# Altium PCB SmartstickQuaternions.PcbDoc
Units mm, origin at the board's own origin, x right, y up, seen from the top; angles counter-clockwise.
Board outline 55 x 49.5 mm, 2 copper layers (Top Layer, Bottom Layer); 20 components, 14 nets, 118 pads, 0 vias.
Unrouted connection lines stored in the file: 1.
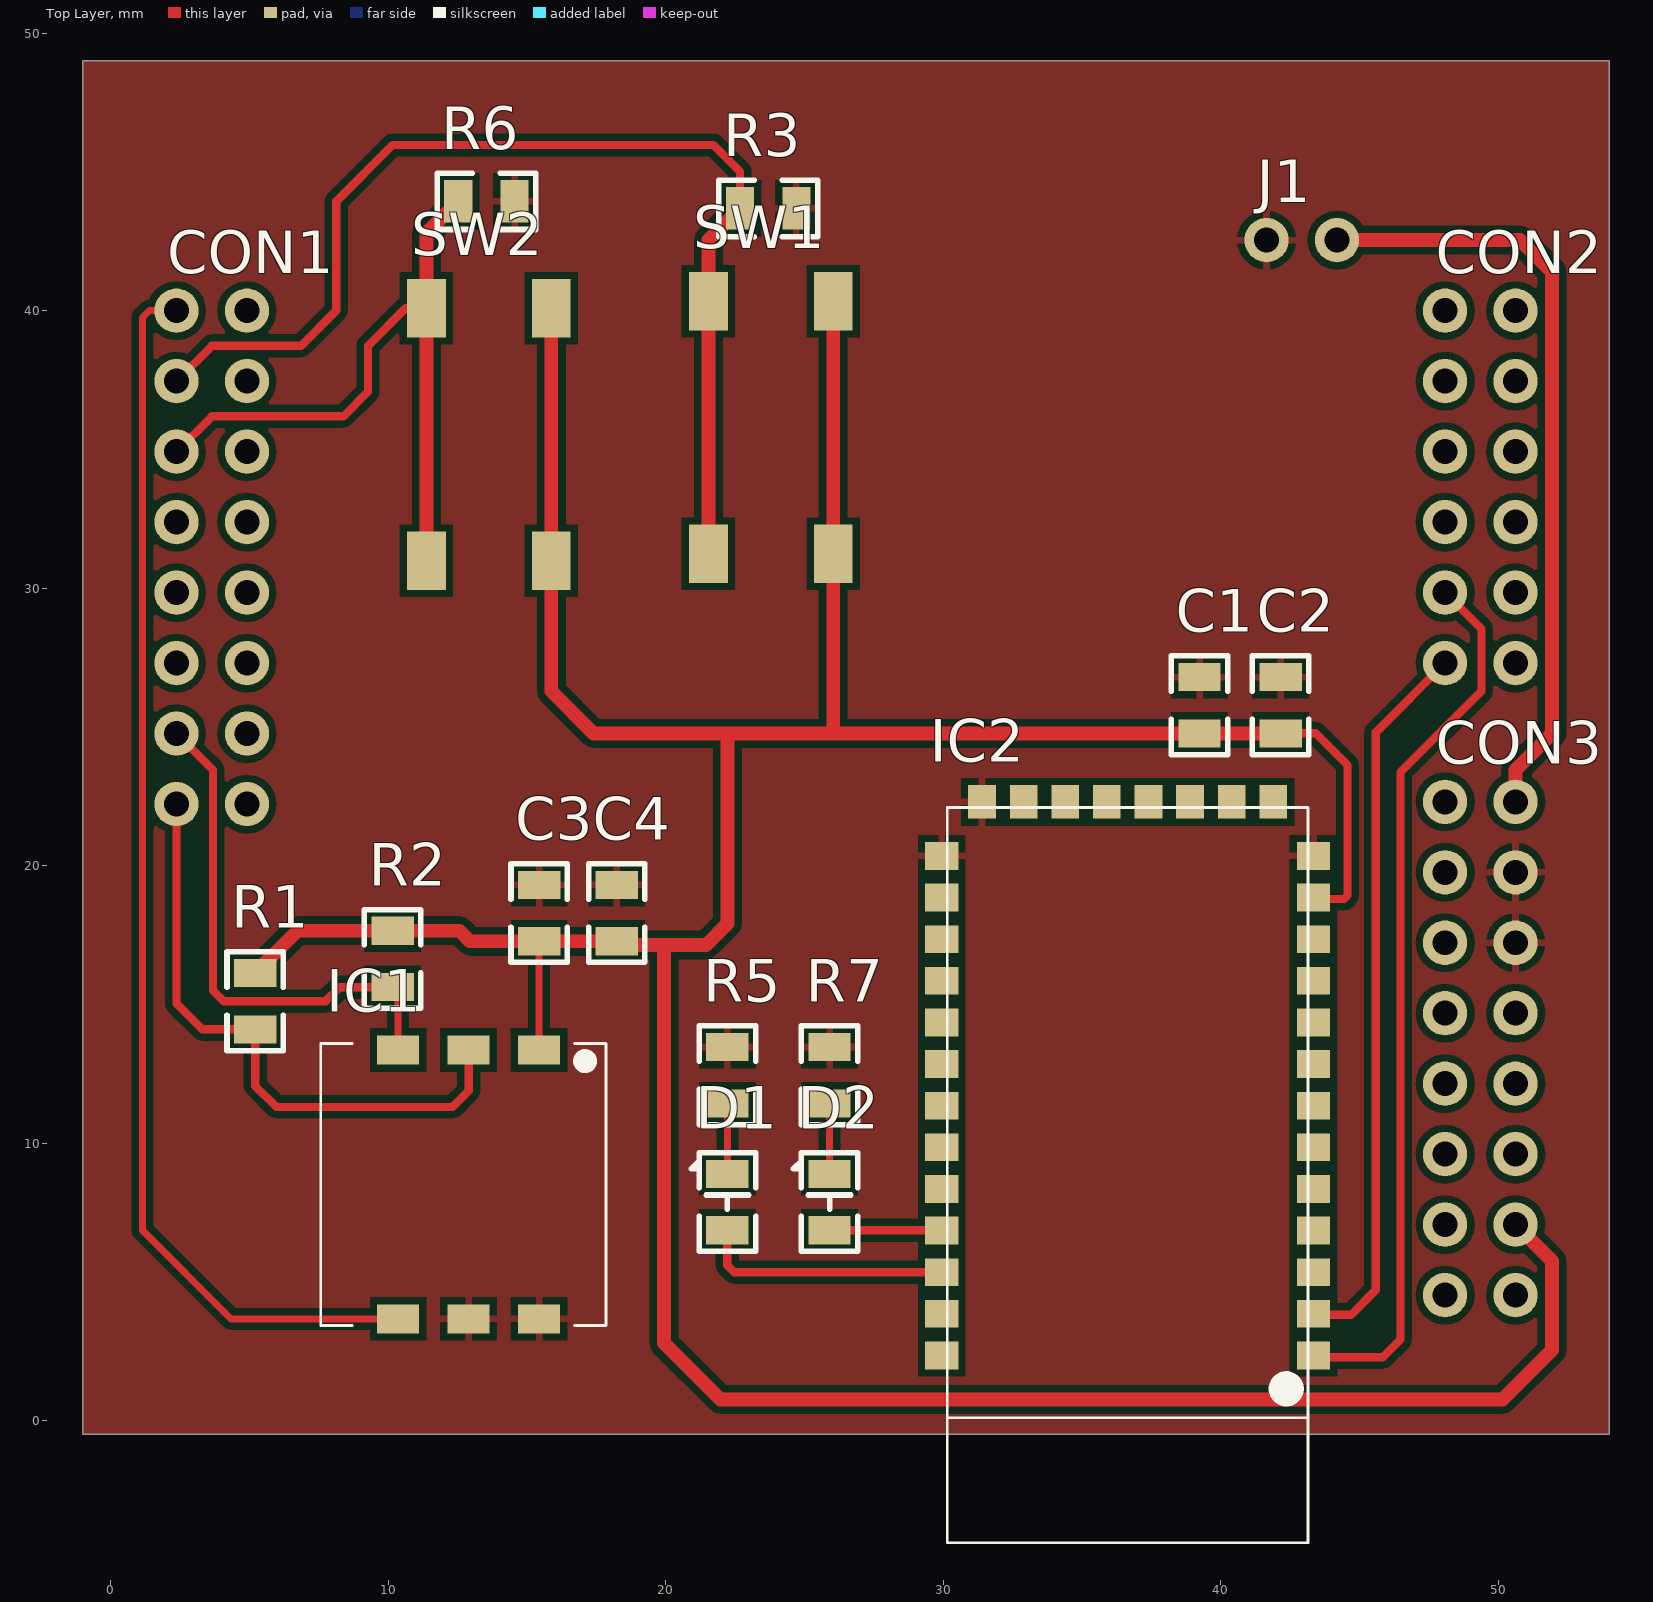
[diagram p0: Top Layer view]
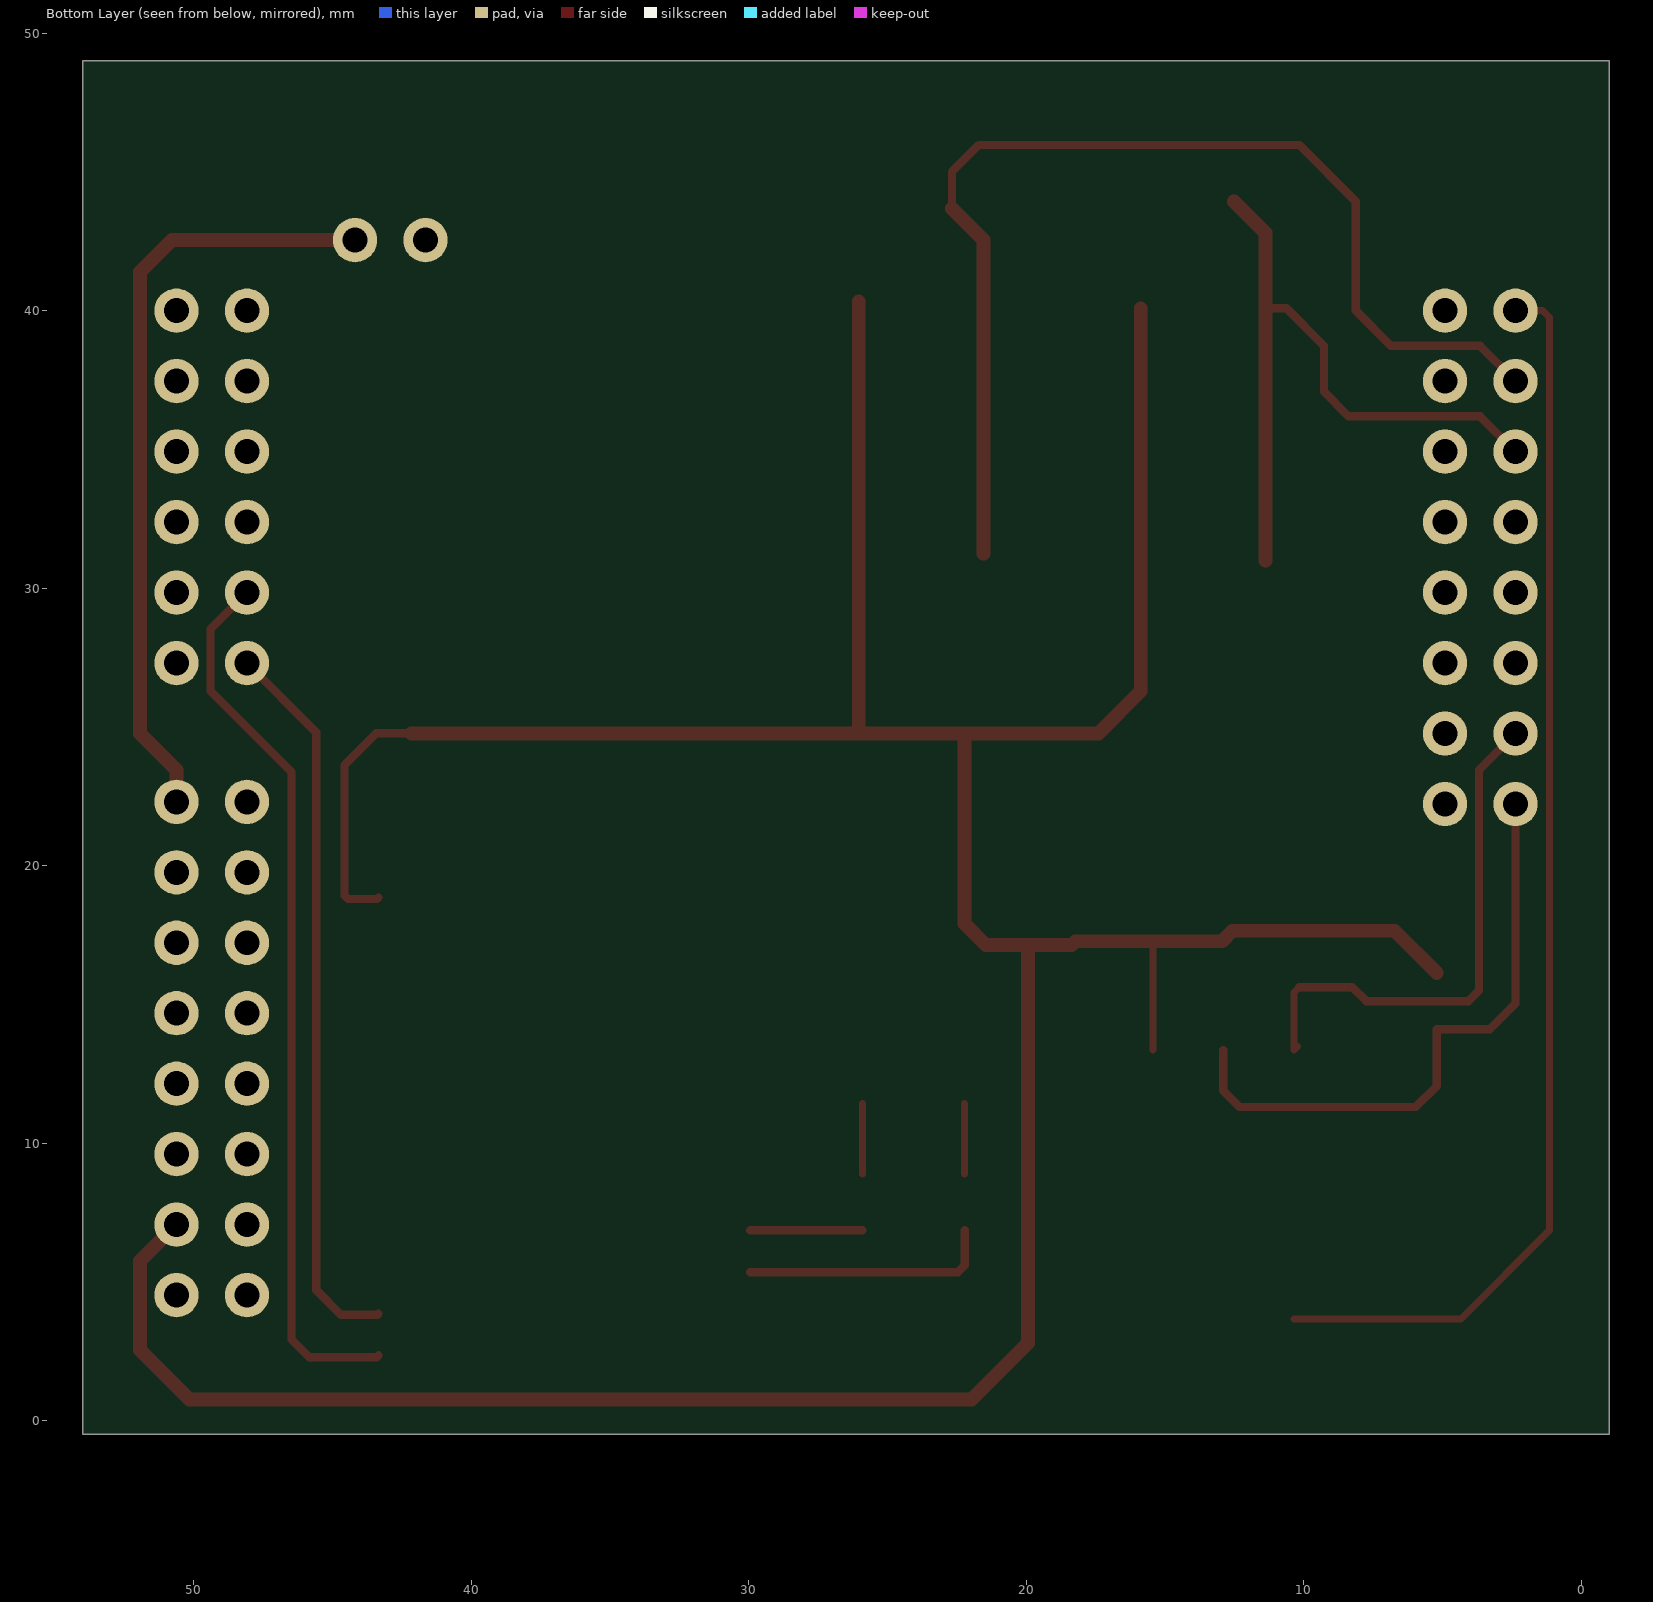
[diagram p1: Bottom Layer view, seen from below]

## Layer stack, top to bottom
Top Solder: solder mask 0.0102, Solder Resist, Dk 3.5
Top Layer: signal copper 0.0356
Dielectric 1: dielectric 0.32, FR-4, Dk 4.8
Bottom Layer: signal copper 0.0356
Bottom Solder: solder mask 0.0102, Solder Resist, Dk 3.5

## Board outline
-1,-0.5 -1,49 54,49 54,-0.5

## Design rules (kind name [scope] priority, off if disabled: settings)
Clearance [All] p1: gap=0.254
PolygonConnect [All] p1: connectstyle=Relief reliefconductorwidth=0.254 reliefentries=4 polygonreliefangle="90 Angle" airgapwidth=0.254
RoutingVias [All] p1: holewidth=0.711 width=1.27 viastyle="Through Hole" minholewidth=0.711 minwidth=1.27 maxholewidth=0.711 maxwidth=1.27
SolderMaskExpansion [All] p1: expansion=0.102
Width [All] p1: maxlimit=1.5 minlimit=0.254 preferedwidth=0.254 minimp=50.000000 maximp=50.000000 favimp=50.000000
29 further rules are at their usual default settings.

## Components (designator, comment, footprint, x,y, rotation, side; value= is the part's Value field where it differs from the comment)
C1 "1uF" 080503 39.243,25.781 r90 top
C2 "100nF" 080503 42.164,25.781 r90 top
C3 "1uF" 080503 15.443,18.288 r90 top
C4 "100nF" 080503 18.237,18.288 r90 top
CON1 "CON_8_2" J208 2.37,40 r270 top locked
CON2 "CON_6_2" J206 48.09,40 r270 top locked
CON3 "CON_8_2" J208 48.09,22.3 r270 top locked
D1 "LED" 0805_Led 22.225,7.874 r90 top
D2 "LED" 0805_Led 25.908,7.874 r90 top
IC1 "EM7180SFP" Footprint_EM7180 7.569,8.509 r270 top
IC2 "Bluetooth" "BT HC-05" 36.652,22.098 r180 top
J1 "CON2" J201 44.196,42.545 r180 top
R1 "RES" 080501 5.207,15.113 r270 top
R2 "RES" 080501 10.16,16.637 r270 top
R3 "RES" 080501 23.698,43.688 r0 top
R5 "RES" 080501 22.225,12.446 r90 top
R6 "RES" 080501 13.538,43.942 r0 top
R7 "RES" 080501 25.908,12.446 r90 top
SW1 "SW PUSHBUTTON" BOUTONPOUSSOIR 21.539,31.242 r0 top
SW2 "SW PUSHBUTTON" BOUTONPOUSSOIR 11.379,30.988 r0 top

## Footprints (in the part's own frame and the unit in brackets; to place one, negate y for a bottom-side part, rotate by r counter-clockwise, add the part's x,y. Pads: shape width x height; smd on the part's side, far side on the other; paste and mask are expansions set on the pad)
0805_Led [mil] "0805 pour LED SMD"
  rect 40x60 smd: 1(-40,0) 2(40,0)
  silkscreen extent -70,-40 70,51
080501 [mil]
  rect 40x60 smd: 1(-40,0) 2(40,0)
  silkscreen extent -70,-40 70,40
080503 [mil]
  rect 40x60 smd: 1(-40,0) 2(40,0)
  silkscreen extent -70,-40 70,40
BOUTONPOUSSOIR [mm]
  rect 1.4x2.1 smd: 1(0,0) 1(0,9.1) 2(4.5,0) 2(4.5,9.1)
"BT HC-05" [mm]
  rect 1.2x1 smd: 1(-6.7,19.75) 2(-6.7,18.25) 3(-6.7,16.75) 4(-6.7,15.25) 5(-6.7,13.75) 6(-6.7,12.25) 7(-6.7,10.75) 8(-6.7,9.25) 9(-6.7,7.75) 10(-6.7,6.25) 11(-6.7,4.75) 12(-6.7,3.25) 13(-6.7,1.75) 22(6.7,1.75) 23(6.7,3.25) 24(6.7,4.75) 25(6.7,6.25) 26(6.7,7.75) 27(6.7,9.25) 28(6.7,10.75) 29(6.7,12.25) 30(6.7,13.75) 31(6.7,15.25) 32(6.7,16.75) 33(6.7,18.25) 34(6.7,19.75)
  rect 1x1.2 smd: 14(-5.25,-0.2) 15(-3.75,-0.2) 16(-2.25,-0.2) 17(-0.75,-0.2) 18(0.75,-0.2) 19(2.25,-0.2) 20(3.75,-0.2) 21(5.25,-0.2)
  silkscreen extent -6.5,0 6.5,26.5
Footprint_EM7180 [mm]
  rect 1.05x1.52 smd: 1(-4.845,7.87) 2(-4.845,5.33) 3(-4.845,2.79) 4(4.845,2.79) 5(4.845,5.33) 6(4.845,7.87)
  silkscreen extent -5.08,0 5.08,10.28
J201 [mm]
  round 1.6 hole 0.9: 1(0,0) 2(2.54,0)
J206 [mm]
  round 1.6 hole 0.9: 1(0,0) 2(2.54,0) 3(5.08,0) 4(7.62,0) 5(10.16,0) 6(12.7,0) 7(12.7,2.54) 8(10.16,2.54) 9(7.62,2.54) 10(5.08,2.54) 11(2.54,2.54) 12(0,2.54)
J208 [mm]
  round 1.6 hole 0.9: 1(0,0) 2(2.54,0) 3(5.08,0) 4(7.62,0) 5(10.16,0) 6(12.7,0) 7(15.24,0) 8(17.78,0) 9(17.78,2.54) 10(15.24,2.54) 11(12.7,2.54) 12(10.16,2.54) 13(7.62,2.54) 14(5.08,2.54) 15(2.54,2.54) 16(0,2.54)

## Part data
C1 C2 C3 C4: library part CAPA, "Condo céramique"
D1 D2: "Led"
IC2: library part SEEDSTUDIO_HC-05
J1: "Con2"
R1 R2 R3 R5 R6 R7: "Resistance"

## Nets (pads, with @x,y where several pads share a name; then routed paths per layer and width w, separated by ;. In a path a pad name is that pad's centre, name@x,y a point inside that pad or via, vN(x,y) a via of type N, cw(c..) or ccw(c..) an arc to the next point about the centre after c; other vN are vias at no path point)
3.3V: C1.1 C2.1 C3.1 C4.1 CON3.10 CON3.12 IC1.1 IC2.12 R1.1 R2.1 SW1.2 SW2.2 | length 147.1
  Top Layer w0.254: IC1.1 15.443,13.358 C3.1
  Top Layer w0.3: C2.1 43.434,24.765 44.577,23.622 44.577,18.923 44.45,18.796 43.404,18.796 IC2.12
  Top Layer w0.5: R1.1 6.731,17.653 R2.1 12.573,17.653 12.954,17.272 C3.1 C4.1 18.364,17.145 19.939,17.145 ; SW2.2@15.879,40.088 15.879,30.988 15.879,26.285 17.399,24.765 22.225,24.765 ; SW1.2@26.039,40.342 26.039,31.242 26.039,24.769 26.035,24.765 ; C2.1 C1.1 26.035,24.765 ; CON3.10 51.943,5.747 51.943,2.54 50.165,0.762 21.971,0.762 19.939,2.794 19.939,17.145 ; 19.939,17.145 21.463,17.145 22.225,17.907 22.225,24.765 ; 22.225,24.765 26.035,24.765
GND: C1.2 C2.2 C3.2 C4.2 CON3.14 CON3.15 IC1.5 IC1.6 IC2.13 IC2.21 IC2.22 J1.2 R3.2 R5.2 R6.2 R7.2
I2C0_SCL: CON1.7 IC1.3 R2.2 | length 19.5
  Top Layer w0.254: CON1.7 CON1.7@2.672,24.76 ; R2.2 10.359,15.422 IC1.3 IC1.3@10.236,13.477
  Top Layer w0.3: CON1.7 3.683,23.447 3.683,15.494 4.064,15.113 7.747,15.113 8.255,15.621 R2.2
I2C0_SDA: CON1.8 IC1.2 R1.2 | length 22.2
  Top Layer w0.3: CON1.8 2.37,15.029 3.302,14.097 R1.2 5.207,12.065 5.969,11.303 12.319,11.303 12.899,11.883 IC1.2
INT_EM7180SFP: CON1.1 IC1.4 | length 44.8
  Top Layer w0.254: CON1.1 2.365,40.005 1.397,40.005 1.143,39.751 1.143,6.858 4.337,3.664 IC1.4
NetD1_1: D1.1 IC2.32 | length 9.1
  Top Layer w0.3: D1.1 22.225,5.588 22.465,5.348 IC2.32
NetD1_2: D1.2 R5.1 | length 2.5
  Top Layer w0.254: D1.2 R5.1
NetD2_1: D2.1 IC2.31 | length 4.1
  Top Layer w0.254: D2.1 D2.1@25.918,6.848
  Top Layer w0.3: D2.1 29.942,6.858 IC2.31
NetD2_2: D2.2 R7.1 | length 2.5
  Top Layer w0.254: D2.2 R7.1
RXUC_TXCAP: CON2.5 IC2.1 | length 32.1
  Top Layer w0.3: IC2.1 43.414,2.286 45.847,2.286 46.482,2.921 46.482,23.368 49.403,26.289 49.403,28.527 CON2.5
SW1: CON1.2 R3.1 SW1.1 | length 41
  Top Layer w0.3: CON1.2 3.645,38.735 6.858,38.735 8.128,40.005 8.128,43.942 10.16,45.974 21.717,45.974 22.682,45.009 R3.1
  Top Layer w0.5: CON1.2 CON1.2@2.535,37.46 ; SW1.1@21.539,31.242 21.539,40.342 21.539,42.545 R3.1
SW2: CON1.3 R6.1 SW2.1 | length 25.5
  Top Layer w0.3: CON1.3 3.645,36.195 8.382,36.195 9.271,37.084 9.271,38.735 10.624,40.088 SW2.1@11.379,40.088
  Top Layer w0.5: SW2.1@11.379,30.988 11.379,40.088 11.379,42.799 R6.1
TXUC_RXCAP: CON2.6 IC2.2 | length 26.3
  Top Layer w0.254: CON2.6@48.085,27.305 CON2.6
  Top Layer w0.3: IC2.2 43.39,3.81 44.704,3.81 45.593,4.699 45.593,24.803 CON2.6
VIN_5-9V: CON3.16 J1.1 | length 27.9
  Top Layer w0.5: J1.1 50.8,42.545 51.943,41.402 51.943,24.765 50.63,23.452 CON3.16
pads on no net: CON1.4 CON1.5 CON1.6 CON1.9 CON1.10 CON1.11 CON1.12 CON1.13 CON1.14 CON1.15 CON1.16 CON2.1 CON2.2 CON2.3 CON2.4 CON2.7 CON2.8 CON2.9 CON2.10 CON2.11 CON2.12 CON3.1 CON3.2 CON3.3 CON3.4 CON3.5 CON3.6 CON3.7 CON3.8 CON3.9 CON3.11 CON3.13 IC2.3 IC2.4 IC2.5 IC2.6 IC2.7 IC2.8 IC2.9 IC2.10 IC2.11 IC2.14 IC2.15 IC2.16 IC2.17 IC2.18 IC2.19 IC2.20 IC2.23 IC2.24 IC2.25 IC2.26 IC2.27 IC2.28 IC2.29 IC2.30 IC2.33 IC2.34

## Polygon pours and split planes (outlines as drawn)
GND on Top Layer "Top Layer-No Net" (solid, remove dead copper, pour order 6): -1,49 54,49 54,-0.5 -1,-0.5

## Silkscreen, mask and mechanical layers (free items; w line width, h text height)
Mechanical 1:
  the board outline again, w0.1